# EAGLE board brd_ilhamwidyonugroho_gk1 (EAGLE 9.6.2)
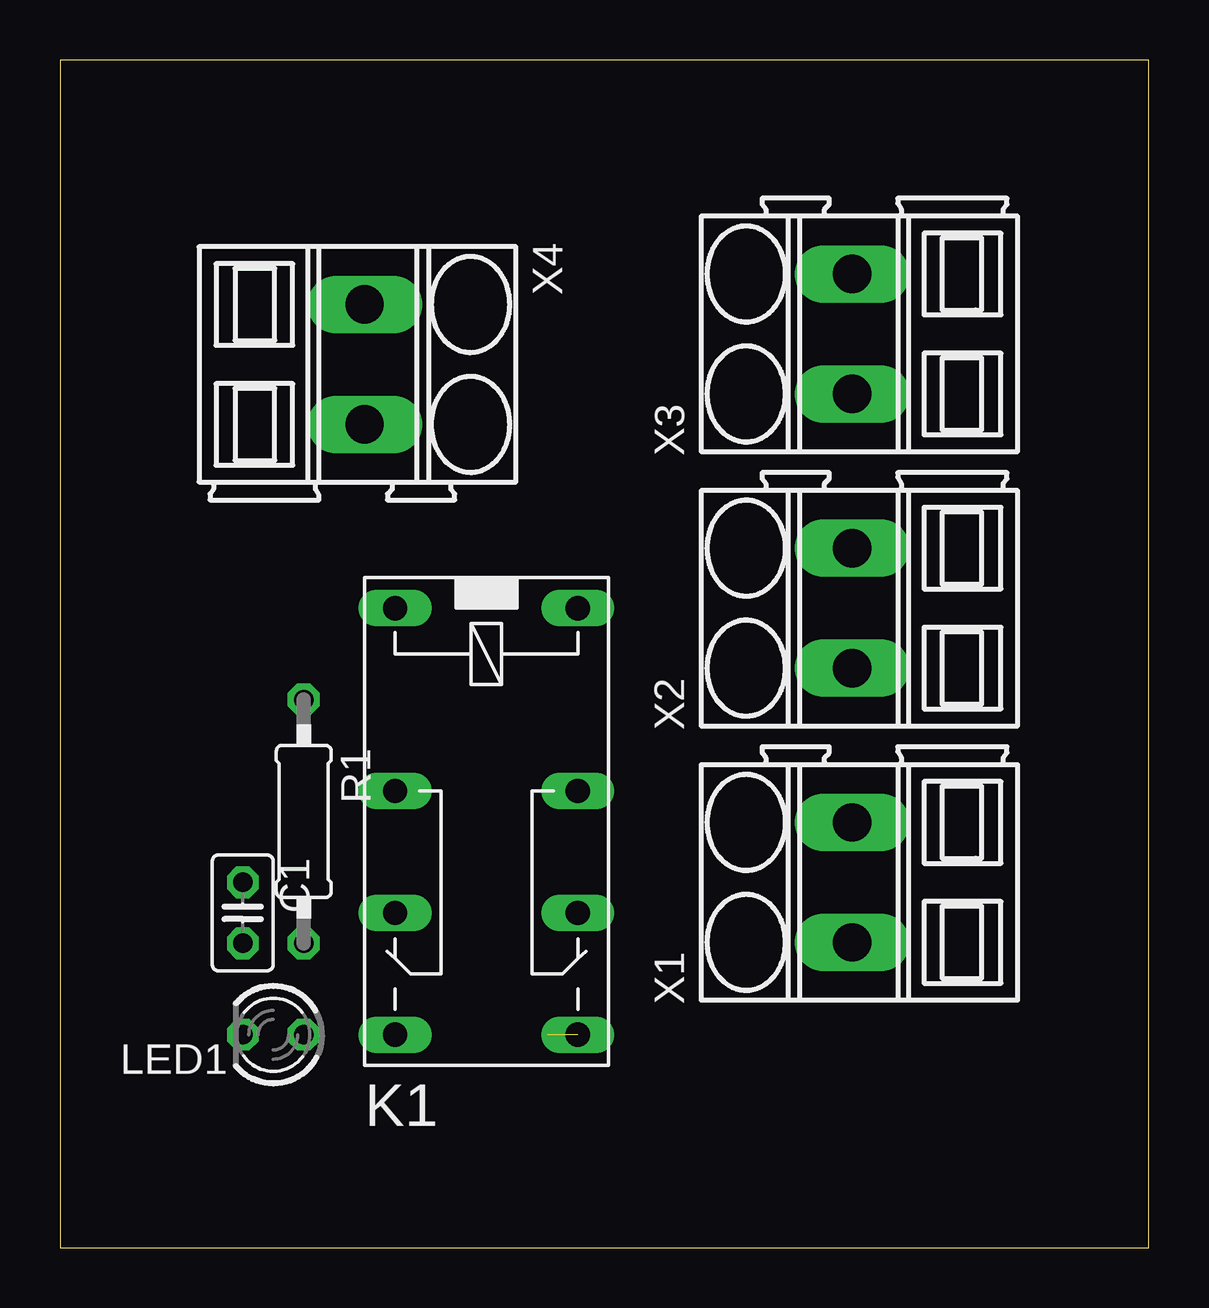
[diagram p0: board, top side]
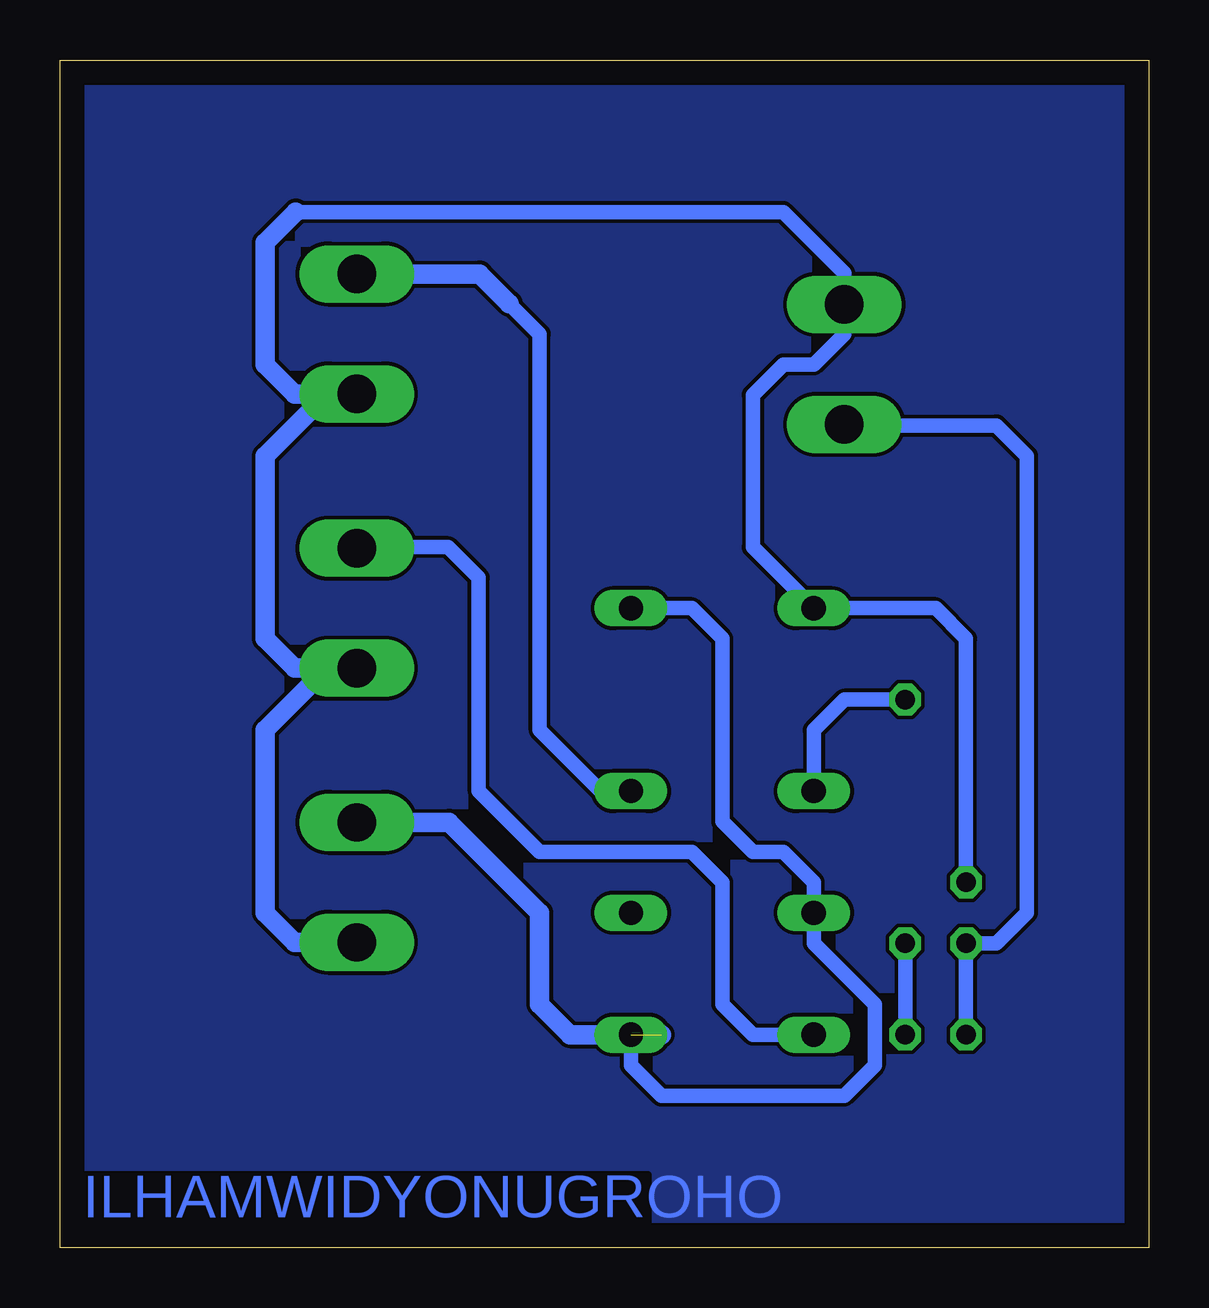
[diagram p1: board, bottom side, seen from below]

Size 45.39 x 49.52 mm. Coordinates in mm from the lower left corner, seen from the top.
Outline: 0,0 45.39,0 45.39,49.52 0,49.52 0,0
Copper layers (1*16): Top 0.035mm / dielectric 1.5mm / Bottom 0.035mm
Design rules "default": minimum track width 6mil, minimum drill 0.35mm, track to track 6mil, track to pad 6mil, pad to pad 6mil, via to via 6mil, smd to smd 6mil, copper to edge 40mil, drill to drill 6mil, minimum pad ring 10mil, minimum via ring 8mil, stop-mask expansion 4mil, vias tented up to drill 0mil, thermal gap 10mil

## Footprints (pad centres in the part's own frame; a part is rotated, then mirrored left to right if it is on the bottom)
C025-025X050 = drill 0.813 octagon: 1 -1.27,0; 2 1.27,0
351 = drill 1.016 long: 1 -3.81,-3.81; 16 -3.81,3.81; O1 8.89,-3.81; O2 8.89,3.81; P1 3.81,-3.81; P2 3.81,3.81; S1 13.97,-3.81; S2 13.97,3.81
LED3MM = drill 0.813 octagon: A -1.27,0; K 1.27,0
0207/10 = drill 0.813 octagon: 1 -5.08,0; 2 5.08,0
SMKDSP_1,5/2 = drill 1.6 pad 1.8 long: 1 -2.5,0; 2 2.5,0

## Placement (x,y rotation side)
C1  [C025-025X050]  7.62,13.97 270 top
K1  351  [351]  17.78,22.86 270 top
LED1  [LED3MM]  8.89,8.89 180 top
R1  [0207/10]  10.16,17.78 270 top
X1  SMKDSP_1,5/2  [SMKDSP_1,5/2]  33.02,15.24 90 top
X2  SMKDSP_1,5/2  [SMKDSP_1,5/2]  33.02,26.67 90 top
X3  SMKDSP_1,5/2  [SMKDSP_1,5/2]  33.02,38.1 90 top
X4  SMKDSP_1,5/2  [SMKDSP_1,5/2]  12.7,36.83 270 top

## Library data of the parts
C1 = rcl; SPICEPREFIX: C
K1 = relay; OC_FARNELL: unknown; OC_NEWARK: unknown
LED1 = led
R1 = rcl; SPICEPREFIX: R
X1-X4 = con-phoenix-smkdsp; MF: FARNELL; MPN: 1733570; OC_FARNELL: 3041244; OC_NEWARK: 69C8588

## Nets
GND: C1.1 K1.1 X1.1 X2.1 X3.1 X4.1
N$1: K1.P1 R1.1
N$2: LED1.A R1.2
O1: K1.S1 X2.2
P2: K1.P2 X3.2
S12: K1.16 K1.O1 K1.S2 X1.2
VOUT: C1.2 LED1.K X4.2

## Tracks (layer width: path | path; a pad name or v marks a point on that pad's centre or on a via)
GND
  Bottom 0.61: C1.1 7.62,25.4 8.89,26.67 K1.1 16.51,29.21 16.51,35.56 15.24,36.83 13.97,36.83 12.7,38.1 X4.1 12.7,40.64 15.24,43.18 35.56,43.18
  Bottom 0.813: 35.56,43.18 36.83,41.91 36.83,36.83 35.6,35.6 X3.1 34.25,35.6 36.83,33.02 36.83,25.4 35.6,24.17 X2.1 34.25,24.17 36.83,21.59 36.83,13.97 35.6,12.74 X1.1
N$1
  Bottom 0.61: R1.1 12.7,22.86 13.97,21.59 K1.P1
N$2
  Bottom 0.61: R1.2 LED1.A
O1
  Bottom 0.61: K1.S1 16.51,8.89 17.78,10.16 17.78,15.24 19.05,16.51 25.4,16.51 27.94,19.05 27.94,27.94 29.21,29.21 32.98,29.21 X2.2
P2
  Bottom 0.61: K1.P2 22.86,19.05 25.4,21.59 25.4,38.1 26.67,39.37
  Bottom 0.813: X3.2 27.9,40.6 26.67,39.37
S12  (1 unrouted)
  Bottom 0.61: K1.16 19.05,26.67 17.78,25.4 17.78,17.78 16.51,16.51 15.24,16.51 13.97,15.24 K1.O1 13.97,12.7 11.43,10.16 11.43,7.62 12.7,6.35 20.32,6.35 21.59,7.62 K1.S2
  Bottom 0.813: X1.2 29.17,17.74 25.4,13.97 25.4,10.16 24.13,8.89 20.32,8.89
S$1
  pour Bottom: 0,43.18 0,0 45.72,0 45.72,49.53 0,49.53
VOUT
  Bottom 0.61: LED1.K C1.2 6.35,12.7 5.08,13.97 5.08,33.02 6.35,34.29 12.66,34.29 X4.2

## Text on the board
Bottom: ILHAMWIDYONUGROHO